# EAGLE board SparkFun_Qwiic_Thermocouple_Amplifier_PCC (EAGLE 9.5.0)
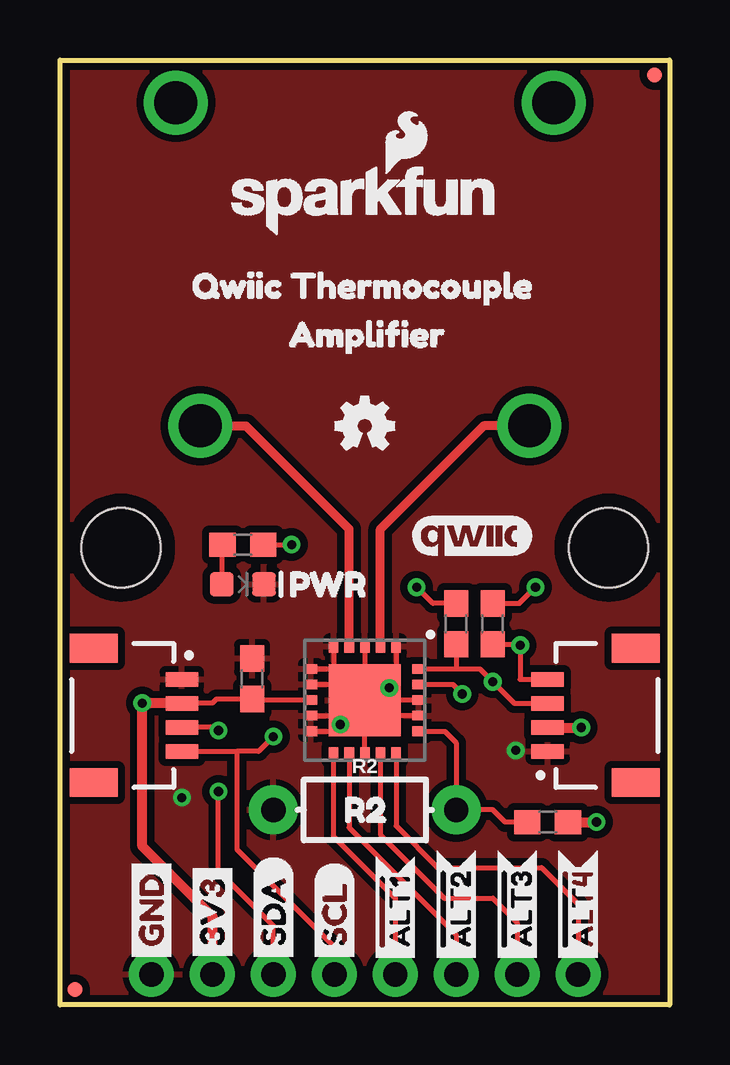
[diagram p0: board, top side]
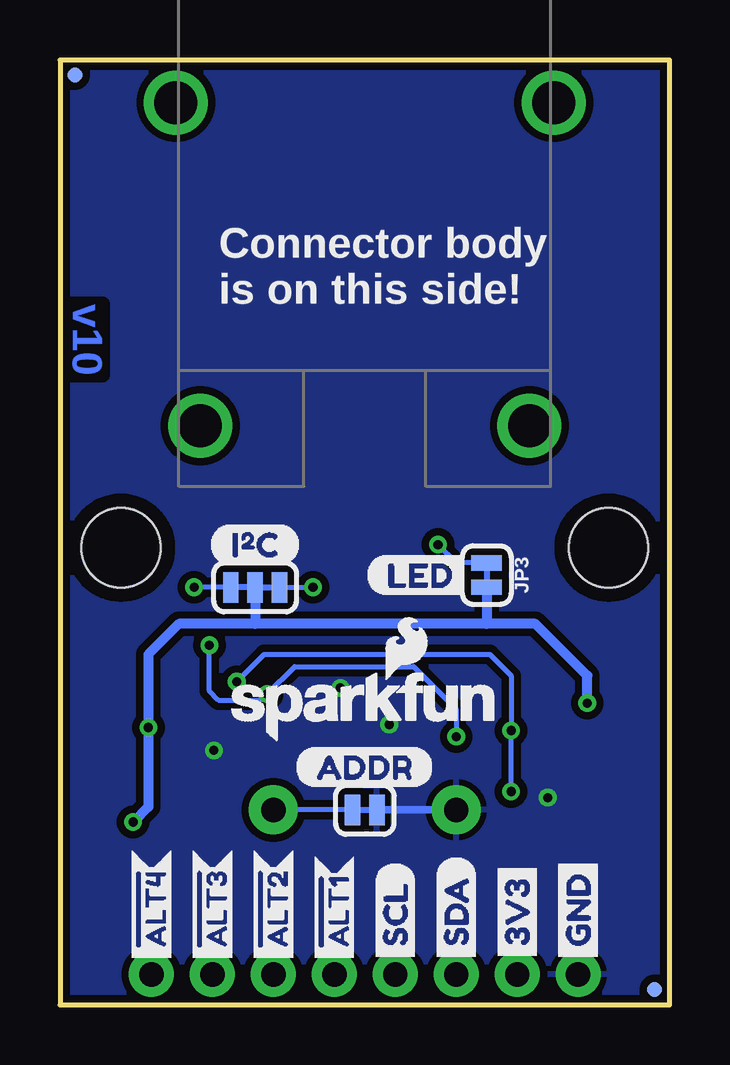
[diagram p1: board, bottom side, seen from below]

Size 25.4 x 39.37 mm. Coordinates in mm from the lower left corner, seen from the top.
Outline: 0,0 0,39.37 25.4,39.37 25.4,0 0,0
Copper layers (1*16): Top 0.035mm / dielectric 1.5mm / Bottom 0.035mm
Design rules "SparkFun-2-layer-TIGHT": minimum track width 7mil, minimum drill 15mil, track to track 7mil, track to pad 7mil, pad to pad 7mil, via to via 7mil, smd to smd 7mil, copper to edge 7mil, drill to drill 7mil, minimum pad ring 7mil, minimum via ring 7mil, stop-mask expansion 4mil, vias tented up to drill 25mil, thermal gap 10mil
tRestrict: 3 lines

## Footprints (pad centres in the part's own frame; a part is rotated, then mirrored left to right if it is on the bottom)
0603 = smd 1.1 x 1: 1 -0.85,0; 2 0.85,0
LED-0603 = smd 1 x 1: A -0.877,0; C 0.877,0
FIDUCIAL-MICRO = smd 0.635 x 0.635: 1 0,0
1X04_NO_SILK = drill 1.016 pad 1.88: 1 0,0; 2 2.54,0; 3 5.08,0; 4 7.62,0
JST04_1MM_RA = smd 0.6 x 1.35: 1 -1.5,0; 2 -0.5,0; 3 0.5,0; 4 1.5,0 | smd 1.2 x 2: NC1 2.8,-3.675; NC2 -2.8,-3.675
PCC-SMP = drill 1.778: + 6.858,0; - -6.858,0; CLIP1 -7.874,-13.462; CLIP2 7.874,-13.462
SMT-JUMPER_2_NC_TRACE_SILK = smd 0.635 x 1.27: 1 -0.508,0; 2 0.508,0
SMT-JUMPER_3_2-NC_TRACE_SILK = smd 0.635 x 1.27: 1 -1.016,0; 2 0,0; 3 1.016,0
STAND-OFF = hole 3.302: 0,0
AXIAL-0.3-KIT = drill 1.016 pad 2.032: P$1 -3.81,0; P$2 3.81,0
MQFN-20 = smd 0.55 x 0.4: 1 -2.25,1.3; 2 -2.25,0.65; 3 -2.25,0; 4 -2.25,-0.65; 5 -2.25,-1.3; 11 2.25,-1.3; 12 2.25,-0.65; 13 2.25,0; 14 2.25,0.65; 15 2.25,1.3 | smd 0.4 x 0.55: 6 -1.3,-2.25; 7 -0.65,-2.25; 8 0,-2.25; 9 0.65,-2.25; 10 1.3,-2.25; 16 1.3,2.25; 17 0.65,2.25; 18 0,2.25; 19 -0.65,2.25; 20 -1.3,2.25 | smd 3 x 3: 21 0,0

## Placement (x,y rotation side)
C1  0.1uF  [0603]  8,13.59 90 top
D1  RED  [LED-0603]  7.62,17.53 0 top
FD1  FIDUCIALUFIDUCIAL  [FIDUCIAL-MICRO]  0.64,0.64 0 top
FD2  FIDUCIALUFIDUCIAL  [FIDUCIAL-MICRO]  24.77,38.73 0 top
FD3  FIDUCIALUFIDUCIAL  [FIDUCIAL-MICRO]  24.77,38.73 0 bottom
FD4  FIDUCIALUFIDUCIAL  [FIDUCIAL-MICRO]  0.64,0.64 0 bottom
FRAME1  FRAME-LETTER  [CREATIVE_COMMONS]  -13.97,-19.05 0 top  (outside the outline)
J1  PTH  [1X04_NO_SILK]  3.81,1.27 0 top
J2  QWIIC  [JST04_1MM_RA]  20.32,12.06 90 top
J3  QWIIC  [JST04_1MM_RA]  5.08,12.06 270 top
J4  [1X04_NO_SILK]  13.97,1.27 0 top
J5  PCB_THERMOCOUPLE  [PCC-SMP]  12.7,24.13 180 bottom
JP1  [SMT-JUMPER_2_NC_TRACE_SILK]  12.7,8.13 0 bottom
JP2  I2C  [SMT-JUMPER_3_2-NC_TRACE_SILK]  17.27,17.4 0 bottom
JP3  [SMT-JUMPER_2_NC_TRACE_SILK]  7.62,17.91 270 bottom
JP8  STAND-OFF  [STAND-OFF]  22.86,19.05 0 top
JP9  STAND-OFF  [STAND-OFF]  2.54,19.05 0 top
LOGO1  OSHW-LOGOMINI  [OSHW-LOGO-MINI]  12.7,24.13 0 top
LOGO2  SFE_LOGO_NAME_FLAME.1_INCH  [SFE_LOGO_NAME_FLAME_.1]  12.7,12.45 0 bottom
LOGO3  QWIIC_LOGO_5MM  [QWIIC_5MM]  17.14,19.56 0 top
R1  1k  [0603]  7.62,19.18 180 top
R2  [AXIAL-0.3-KIT]  12.7,8.13 0 top
R3  10k  [0603]  20.32,7.62 0 top
R4  2.2k  [0603]  16.51,15.88 90 top
R5  2.2k  [0603]  18.03,15.88 90 top
U1  MCP9600-SMD  [MQFN-20]  12.7,12.7 270 top
U$1  [#ALT30]  19.05,1.33 90 top
U$2  [R21]  10.92,8.13 0 top
U$3  [#ALT10]  13.97,1.33 90 bottom
U$4  [#ALT20]  16.51,1.33 90 bottom
U$5  [#ALT30]  19.05,1.33 90 bottom
U$6  [QWIIC_THERMOCOUPLE2]  4.57,29.97 0 top
U$7  [#ALT40]  21.59,1.33 90 bottom
U$8  [#ALT10]  13.97,1.33 90 top
U$9  [SCL-[)]  11.43,1.52 90 bottom
U$10  [GND-04]  3.81,1.52 90 top
U$11  [#ALT40]  21.59,1.33 90 top
U$12  [SCL-[)]  11.43,1.52 90 top
U$13  [SDA-[)]  8.89,1.52 90 top
U$14  [SDA-[)]  8.89,1.52 90 bottom
U$15  [PWR0]  8.64,17.53 0 top
U$16  [3V31]  6.35,1.52 90 bottom
U$17  [SFE_LOGO_NAME_FLAME_.1]  12.7,33.53 0 top
U$18  [#ALT20]  16.51,1.33 90 top
U$19  [3V31]  6.35,1.52 90 top
U$20  [LED0]  12.7,17.91 0 bottom
U$21  [I_SUPER2_C-()-04]  19.18,19.18 0 bottom
U$22  [ADDR1]  15.62,9.91 0 bottom
U$23  [GND-04]  3.81,1.52 90 bottom
U$25  [AMPLIFIER2]  8.64,27.94 0 top

## Library data of the parts
C1 = SparkFun-Capacitors; PROD_ID: CAP-00810
D1 = SparkFun-LED; PROD_ID: DIO-00819
FD1-FD4 FRAME1 LOGO1-LOGO3 U$17 = SparkFun-Aesthetics
J1 = SparkFun-Connectors
J2 J3 = SparkFun-Connectors; PROD_ID: CONN-13694; VALUE: QWIIC_RIGHT_ANGLE
J4 = SparkFun-Connectors; PROD_ID: CONN-09696
J5 = SparkFun-Electromechanical; PROD_ID: CONN-13075
JP1-JP3 = SparkFun-Jumpers
JP8 JP9 = SparkFun
R1 = SparkFun-Resistors; PROD_ID: RES-07856
R2 = SparkFun-Resistors
R3 = SparkFun-Resistors; PROD_ID: RES-00824
R4 R5 = SparkFun-Resistors; PROD_ID: RES-08272
U1 = SparkFun-IC-Conversion; PROD_ID: IC-14644
U$1 U$3-U$5 U$7 U$8 U$11 U$18 = MCP9600
U$2 U$15 = buzzard_labels (8)
U$6 = buzzard_labels (3)
U$9 U$10 U$12-U$14 U$21 U$23 = Labels
U$16 U$19 = buzzard_labels
U$20 = buzzard_labels (6)
U$22 = buzzard_labels (9)
U$25 = buzzard_labels (2)

## Nets
3.3V: C1.1 J1.2 J2.2 J3.2 JP2.2 JP3.2 R3.2 U1.8
!ALT1: J4.1 U1.11
!ALT2: J4.2 U1.12
!ALT3: J4.3 U1.14
!ALT4: J4.4 U1.15
ADDR: JP1.1 R2.P$2 R3.1 U1.16
GND: C1.2 D1.C J1.1 J2.1 J3.1 JP1.2 R2.P$1 U1.1 U1.3 U1.5 U1.6 U1.7 U1.9 U1.10 U1.13 U1.17 U1.18 U1.21
N$1: D1.A R1.2
N$2: JP2.1 R5.2
N$3: JP2.3 R4.2
N$4: J5.+ U1.2
N$5: J5.- U1.4
N$6: JP3.1 R1.1
SCL: J1.4 J2.4 J3.4 R5.1 U1.19
SDA: J1.3 J2.3 J3.3 R4.1 U1.20

## Tracks (layer width: path | path; a pad name or v marks a point on that pad's centre or on a via)
3.3V  (via drill 0.38)
  Top 0.203: J3.2 5.09,12.57 6.35,12.57 6.52,12.74 C1.1 8.04,12.7 U1.8
  Top 0.406: J1.2 6.35,3.68 3.43,6.6 v3.43,12.57 5.07,12.57 J3.2 | J2.2 v21.72,11.56 | R3.2 v22.35,7.62
  Bottom 0.406: v3.43,12.57 3.43,13.72 5.59,15.88 7.62,15.88 | 7.62,15.88 17.27,15.88 | 17.27,15.88 20.45,15.88 21.72,14.61 v21.72,11.56 21.72,8.26 v22.35,7.62 | JP2.2 17.27,15.88 | JP3.2 7.62,15.88
!ALT1
  Top 0.203: J4.1 13.97,4.45 11.4,7.01 U1.11
!ALT2
  Top 0.203: U1.12 12.05,7.38 15.62,3.81 16.51,2.92 J4.2
!ALT3
  Top 0.203: U1.14 13.35,7.1 16,4.45 18.03,4.45 19.05,3.43 J4.3
!ALT4
  Top 0.203: U1.15 14,7.46 15.75,5.71 20.07,5.71 21.59,4.19 J4.4
ADDR
  Top 0.203: U1.16 16.03,11.4 16.51,10.92 R2.P$2 18.03,8.13 18.54,7.62 R3.1
  Bottom 0.203: JP1.1 R2.P$2
GND  (via drill 0.38)
  Top 0.203: U1.5 11.4,12.7 U1.21 | U1.3 U1.21 | U1.1 14,12.7 U1.21 | U1.6 12.7,14 U1.21 | U1.7 12.7,13.35 U1.21 | U1.9 12.7,12.05 | U1.10 12.7,11.4 U1.21 | U1.13 U1.21 | U1.17 12.7,12.05 | 12.7,12.05 U1.21 | U1.18 U1.21
  Bottom 0.305: JP1.2 R2.P$1
  other vias: 18.99,10.6 13.72,13.21 11.68,11.68 5.08,8.64
  pour Bottom (isolate 0.305): 25.4,0 25.4,39.37 0,39.37 0,0
  pour Top (isolate 0.305): 0,0 0,39.37 25.4,39.37 25.4,0
N$1
  Top 0.203: R1.2 6.74,19.15 D1.A
N$2  (via drill 0.38)
  Top 0.203: R5.2 19.14,16.73 v19.81,17.4
  Bottom 0.203: JP2.1 v19.81,17.4
N$3  (via drill 0.38)
  Top 0.203: R4.2 15.53,16.73 v14.86,17.4
  Bottom 0.203: JP2.3 v14.86,17.4
N$4
  Top 0.381: U1.2 13.35,19.83 17.65,24.13 J5.+
N$5
  Top 0.381: U1.4 12.05,19.83 7.75,24.13 J5.-
N$6  (via drill 0.38)
  Top 0.203: R1.1 v9.65,19.18
  Bottom 0.203: JP3.1 8.89,18.41 v9.65,19.18
SCL  (via drill 0.38)
  Top 0.203: R5.1 19.18,15.03 v19.18,14.99 19.18,13.56 J2.4 | U1.19 16.37,13.35 v16.76,12.95 | v8.89,11.18 8.28,10.56 7.37,10.56 | J3.4 7.37,10.56 | J1.4 11.43,2.41 7.37,6.48 7.37,10.56
  Bottom 0.203: v19.18,14.99 19.18,13.08 18.8,12.7 17.02,12.7 v16.76,12.95 15.62,14.1 10.67,14.1 8.89,12.32 v8.89,11.18
SDA  (via drill 0.38)
  Top 0.203: U1.20 16.51,14 | 16.51,14 17.5,14 v18.03,13.46 18.93,12.56 J2.3 | R4.1 16.51,14 | v6.6,11.43 6.6,11.56 J3.3 | J1.3 8.89,3.3 6.6,5.59 v6.6,8.89
  Bottom 0.203: v6.6,8.89 v6.6,11.43 6.6,13.72 7.49,14.61 16.89,14.61 v18.03,13.46

## Text on the board
Bottom: v10
bPlace: Connector body / is on this side!
tDocu: Fischer Moseley | Revised by: Alex Wende